# EAGLE board GPS_board (EAGLE 6.6.0)
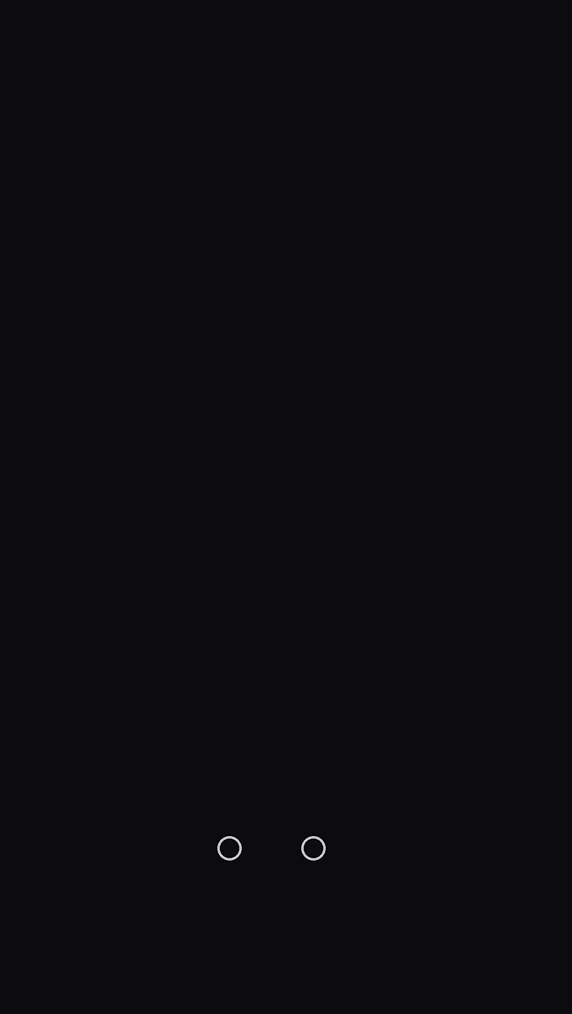
[diagram p0: board, top side]
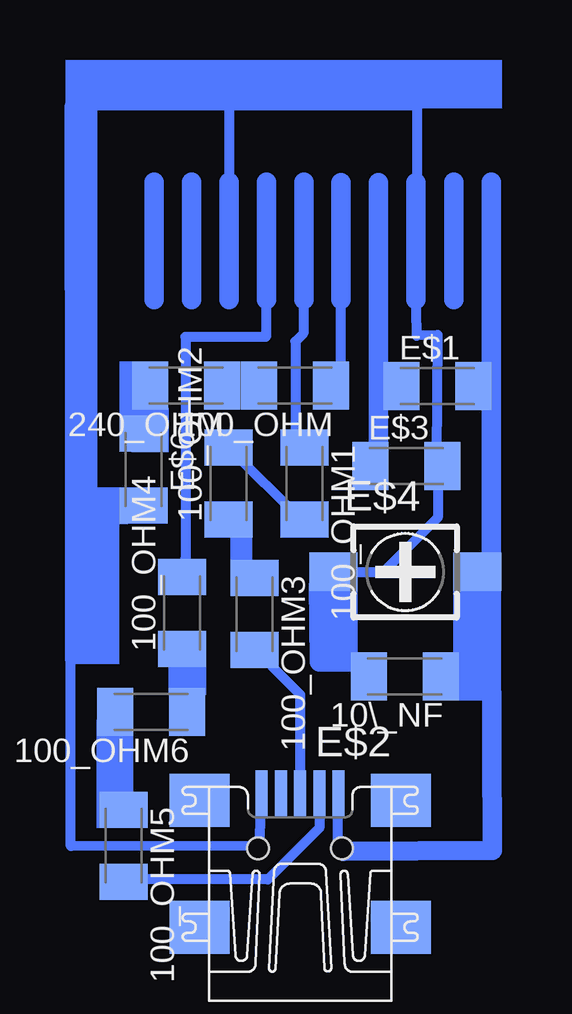
[diagram p1: board, bottom side, seen from below]

No outline drawn. Coordinates in mm, seen from the top.
Copper layers (1*16): Top 0.035mm / dielectric 1.5mm / Bottom 0.035mm
Design rules "default": minimum track width 10mil, minimum drill 24mil, track to track 8mil, track to pad 8mil, pad to pad 8mil, via to via 8mil, smd to smd 8mil, copper to edge 40mil, drill to drill 8mil, minimum pad ring 10mil, minimum via ring 8mil, stop-mask expansion 4mil, vias tented up to drill 0mil, thermal gap 10mil

## Footprints (pad centres in the part's own frame; a part is rotated, then mirrored left to right if it is on the bottom)
C1206K = smd 1.5 x 2: 1 -1.5,0; 2 1.5,0
UX60-MB-5ST = smd 2 x 0.5: 1 2.25,1.6; 2 2.25,0.8; 3 2.25,0; 4 2.25,-0.8; 5 2.25,-1.6 | smd 2.2 x 2.5: M1 -3.3,-4.2; M2 -3.3,4.2; M3 2,4.2; M4 2,-4.2 | hole 0.9: 0,-1.75; 0,1.75
3018_12 = smd 2 x 1.6: + -3,0; - 3,0

## Placement (x,y rotation side)
10\_NF  [C1206K]  9.76,12.56 180 bottom
100_OHM  [C1206K]  14.33,24.67 180 bottom
100_OHM1  [C1206K]  13.94,20.59 270 bottom
100_OHM2  [C1206K]  17.11,20.6 90 bottom
100_OHM3  [C1206K]  16.02,15.15 270 bottom
100_OHM4  [C1206K]  19.04,15.2 90 bottom
100_OHM5  [C1206K]  21.48,5.5 270 bottom
100_OHM6  [C1206K]  20.34,11.08 180 bottom
240_OHM  [C1206K]  18.88,24.67 180 bottom
E$1  [C1206K]  8.4,24.65 0 bottom
E$2  [UX60-MB-5ST]  14.12,5.39 90 bottom
E$3  [C1206K]  9.69,21.32 0 bottom
E$4  [3018_12]  9.74,16.91 0 bottom
E$6  [C1206K]  20.64,21.18 270 bottom

## Library data of the parts
10\_NF 100_OHM 100_OHM1-100_OHM6 240_OHM E$1 E$3 E$6 = resistor
E$2 = con-hirose
E$4 = c-trimm

## Tracks (layer width: path | path; a pad name or v marks a point on that pad's centre or on a via)
S$2
  Bottom 0.813: 6.14,14.17 6.11,5.3 12.32,5.27
S$3
  Bottom 0.406: 8.41,21.67 8.38,26.79 9.26,26.76 9.29,28.88
S$4
  Bottom 0.406: 12.41,28.11 12.44,28.11 12.44,25.38
S$5
  Bottom 0.406: 8.38,21.03 8.38,19.17 10.67,16.88 12.2,16.88 12.23,16.91
S$6
  Bottom 0.813: 6.14,15 6.14,12.61 8.47,12.58
S$7
  Bottom 0.813: 11.32,13.15 13.32,13.15 13.35,16.35
S$8
  Bottom 0.406: 11.76,5.35 12.55,5.38 12.55,8.09
S$9
  Bottom 0.406: 15.78,8.35 15.82,5.5 23.68,5.47 23.73,36.37 17.08,36.37 | 23.73,19.53 20.64,19.5 | 9.26,32.87 9.26,36.37 17.08,36.37 | 17.08,36.37 17.08,32.43
  Bottom 0.813: 7.71,28.27 7.71,33.15 | 9.3,28.27 9.3,33.13 | 10.86,28.27 10.86,33.13 | 12.42,28.27 12.42,33.13 | 13.96,28.27 13.96,33.15 | 15.52,28.27 15.52,33.15 | 17.08,28.27 17.08,32.43 17.08,33.15 | 18.64,28.27 18.64,33.15 | 20.2,28.27 20.2,33.15 | 10.85,21.91 10.85,28.27 | 6.15,13.46 6.15,33.15
S$10
  Bottom 0.406: 13.99,28.61 13.99,26.85 14.32,26.52 14.32,22.29
S$11
  Bottom 0.406: 14.46,19.46 16.64,21.63 16.31,21.93
S$12
  Bottom 0.406: 15.34,16.7 16.31,16.7 16.31,18.99
S$13
  Bottom 0.406: 14.11,7.56 14.11,11.79 15.29,12.97
S$14
  Bottom 0.406: 15.55,28.58 15.55,26.7 18.9,26.7 18.9,17.46
S$15
  Bottom 0.406: 13.32,7.67 13.32,6.23 15.46,4.09 21.05,4.09
S$16
  Bottom 0.813: 21.96,7.06 21.96,10.76
S$17
  Bottom 0.813: 18.93,10.7 18.93,13.7 18.9,13.73
(copper drawn outside any net)
  shapes: Bottom area x15